# EAGLE board xr_vco_components_preroute3 (EAGLE 7.3.0)
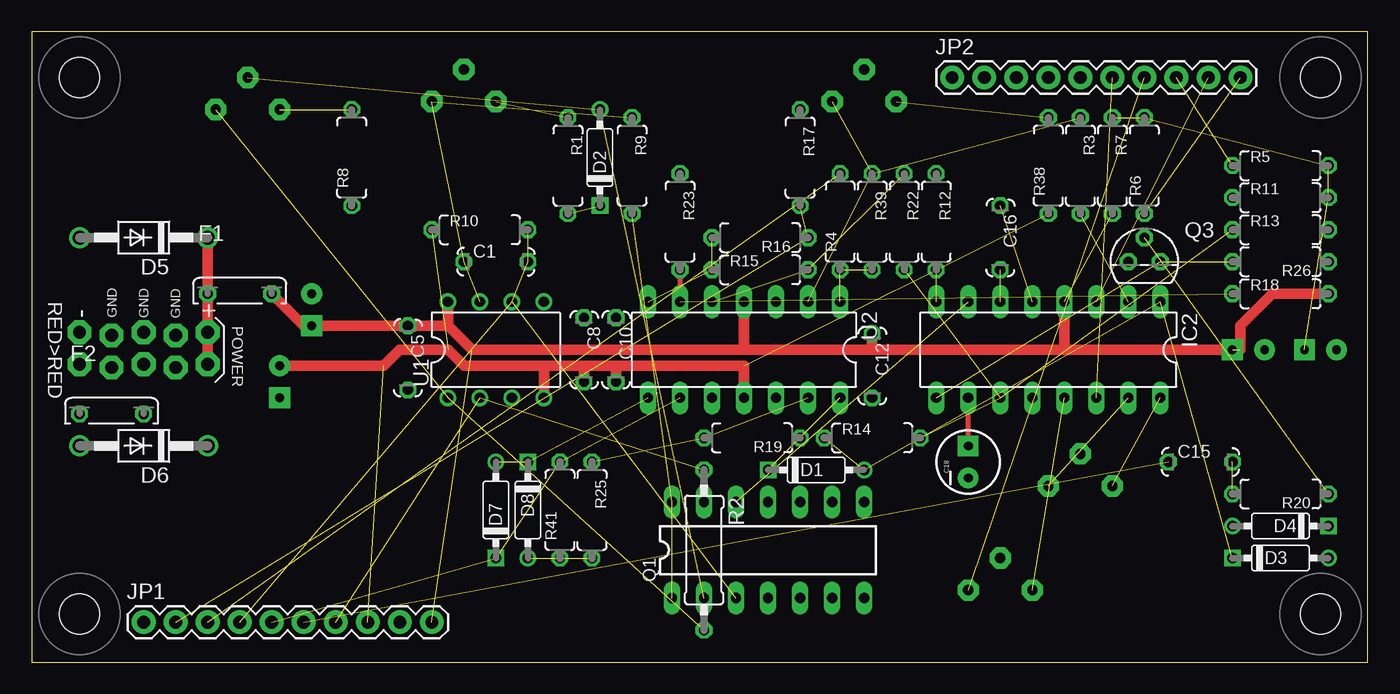
[diagram p0: board, top side]
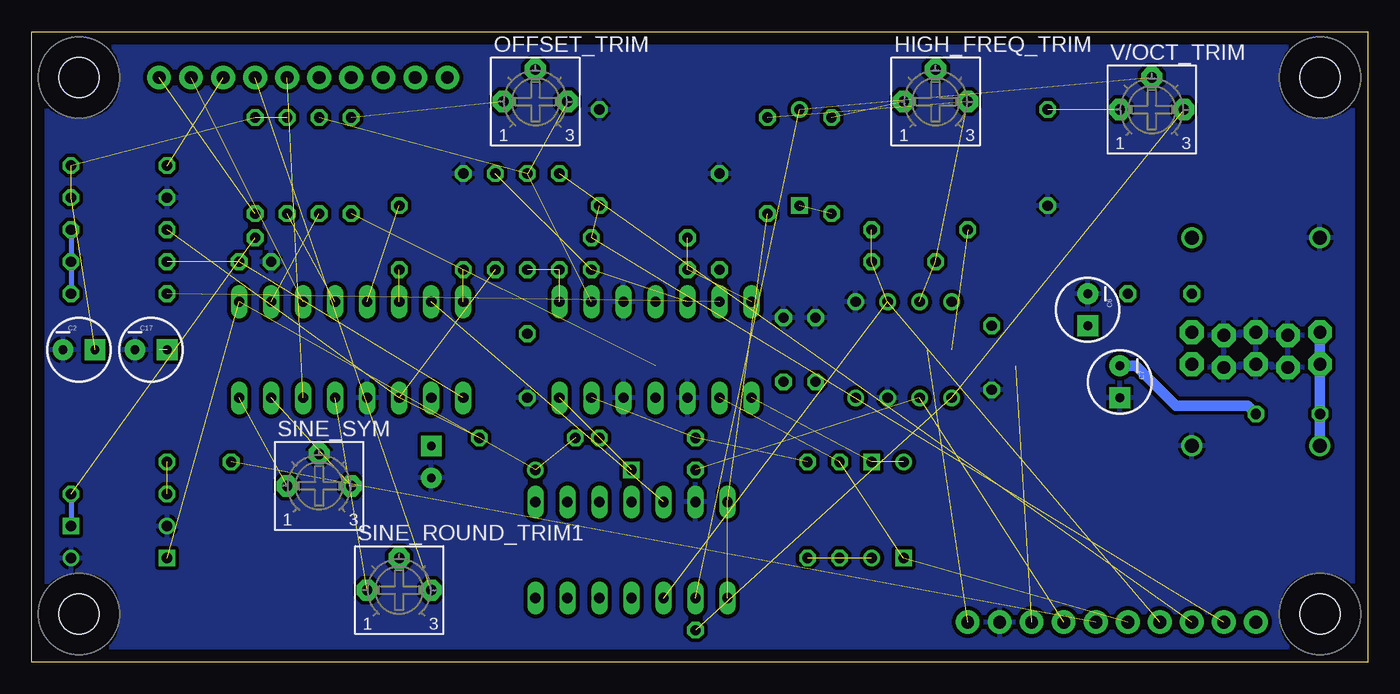
[diagram p1: board, bottom side, seen from below]

Size 106 x 50 mm. Coordinates in mm from the lower left corner, seen from the top.
Outline: 0,0 106,0 106,50 0,50 0,0
Copper layers (1*16): Top 0.035mm / dielectric 1.5mm / Bottom 0.035mm
Design rules "default *": minimum track width 10mil, minimum drill 24mil, track to track 12mil, track to pad 12mil, pad to pad 12mil, via to via 8mil, smd to smd 8mil, copper to edge 40mil, drill to drill 8mil, minimum pad ring 10mil, minimum via ring 8mil, stop-mask expansion 4mil, vias tented up to drill 0mil, thermal gap 10mil
Net classes: 1 power: width 0.406 mm; 2 ground: width 0.305 mm

## Footprints (pad centres in the part's own frame; a part is rotated, then mirrored left to right if it is on the bottom)
C050-024X044 = drill 0.813 octagon: 1 -2.54,0; 2 2.54,0
CPOL-RADIAL-10UF-25V = drill 0.7 pad 1.651 square: 1 1.27,0 | drill 0.7 pad 1.651: 2 -1.27,0
DO35-7 = drill 0.813: A 3.81,0 | drill 0.813 square: C -3.81,0
DO41-10 = drill 1.118: A 5.08,0; C -5.08,0
C050H075X075 = drill 0.813 octagon: 1 -2.54,0; 2 2.54,0
BOURNS_3362P_TRIMMER = drill 0.813 pad 1.676 octagon: 1 -2.54,0; 2 0,2.54; 3 2.54,0
DIL16 = drill 0.813 long: 1 -8.89,-3.81; 2 -6.35,-3.81; 3 -3.81,-3.81; 4 -1.27,-3.81; 5 1.27,-3.81; 6 3.81,-3.81; 7 6.35,-3.81; 8 8.89,-3.81; 9 8.89,3.81; 10 6.35,3.81; 11 3.81,3.81; 12 1.27,3.81; 13 -1.27,3.81; 14 -3.81,3.81; 15 -6.35,3.81; 16 -8.89,3.81
1X10 = drill 1.016 pad 1.88: 1 0,0; 2 2.54,0; 3 5.08,0; 4 7.62,0; 5 10.16,0; 6 12.7,0; 7 15.24,0; 8 17.78,0; 9 20.32,0; 10 22.86,0
DIL14 = drill 0.813 long: 1 -7.62,-3.81; 2 -5.08,-3.81; 3 -2.54,-3.81; 4 0,-3.81; 5 2.54,-3.81; 6 5.08,-3.81; 7 7.62,-3.81; 8 7.62,3.81; 9 5.08,3.81; 10 2.54,3.81; 11 0,3.81; 12 -2.54,3.81; 13 -5.08,3.81; 14 -7.62,3.81
TO92D = drill 0.813 octagon: B 0,1.905; C 1.27,0; E -1.27,0
7MM_RESISTOR = drill 0.813 octagon: 1 -3.81,0; 2 3.81,0
0309/12 = drill 0.813 octagon: 1 -6.35,0; 2 6.35,0
EURO_PWR_HEADER_LOCK = drill 1.016 pad 1.88 octagon: GND1 -2.54,1.143; GND2 -2.54,-1.397; GND3 0,1.397; GND4 0,-1.143; GND5 2.54,1.143; GND6 2.54,-1.397; NEG1 -5.08,1.397; NEG2 -5.08,-1.143; POS1 5.08,1.397; POS2 5.08,-1.143
DIL08 = drill 0.813 pad 1.27: 1 -3.81,-3.81; 2 -1.27,-3.81; 3 1.27,-3.81; 4 3.81,-3.81; 5 3.81,3.81; 6 1.27,3.81; 7 -1.27,3.81; 8 -3.81,3.81
MOUNTING_HOLE = hole 3.2: 0,0

## Placement (x,y rotation side)
C1  100pf  [C050-024X044]  36.83,31.75 0 top
C2  10uf  [CPOL-RADIAL-10UF-25V]  102.23,24.77 0 bottom
C5  100n  [C050-024X044]  29.84,24.13 270 top
C6  10uf  [CPOL-RADIAL-10UF-25V]  22.23,27.94 270 bottom
C7  10uf  [CPOL-RADIAL-10UF-25V]  19.68,22.23 270 bottom
C8  100n  [C050-024X044]  43.81,24.77 270 top
C10  100n  [C050-024X044]  46.35,24.77 270 top
C12  100n  [C050-024X044]  66.67,23.5 270 top
C15  470pf  [C050-024X044]  92.71,15.88 0 top
C16  0.047uf  [C050-024X044]  76.83,33.66 270 top
C17  4.7uf  [CPOL-RADIAL-10UF-25V]  96.52,24.77 0 bottom
C18  4.7uf  [CPOL-RADIAL-10UF-25V]  74.3,15.88 90 top
D1  1N4148  [DO35-7]  62.23,15.24 0 top
D2  1N4148  [DO35-7]  45.09,40.01 90 top
D3  1N4148  [DO35-7]  99.06,8.26 0 top
D4  1N4148  [DO35-7]  99.06,10.79 180 top
D5  1N4001  [DO41-10]  8.89,33.66 180 top
D6  1N4001  [DO41-10]  8.89,17.14 180 top
D7  1N4148  [DO35-7]  36.83,12.06 90 top
D8  1N4148  [DO35-7]  39.37,12.06 270 top
F1  FUSE  [C050H075X075]  16.51,29.21 0 top
F2  FUSE  [C050H075X075]  6.35,19.68 0 top
HIGH_FREQ_TRIM  1M  [BOURNS_3362P_TRIMMER]  34.29,44.45 0 bottom
IC2  [DIL16]  80.64,24.77 180 top
JP1  M10"  [1X10]  8.89,3.17 0 top
JP2  M10"  [1X10]  73.03,46.35 0 top
OFFSET_TRIM  50k  [BOURNS_3362P_TRIMMER]  66.04,44.45 0 bottom
Q1  THAT300P  [DIL14]  58.42,8.89 0 top
Q3  2N3904  [TO92D]  88.27,31.75 0 top
R1  47k  [7MM_RESISTOR]  42.55,39.37 270 top
R2  2k  [0309/12]  53.34,8.89 270 top
R3  82k  [7MM_RESISTOR]  83.19,39.37 270 top
R4  1k  [7MM_RESISTOR]  64.14,34.92 90 top
R5  11k  [7MM_RESISTOR]  99.06,39.37 0 top
R6  20k  [7MM_RESISTOR]  88.27,39.37 90 top
R7  5.6k  [7MM_RESISTOR]  85.72,39.37 270 top
R8  390R  [7MM_RESISTOR]  25.4,40.01 90 top
R9  4.7k  [7MM_RESISTOR]  47.62,39.37 270 top
R10  1.2m  [7MM_RESISTOR]  35.56,34.29 0 top
R11  5.6k  [7MM_RESISTOR]  99.06,36.83 0 top
R12  1k  [7MM_RESISTOR]  71.75,34.92 270 top
R13  4.7k  [7MM_RESISTOR]  99.06,34.29 0 top
R14  10k  [7MM_RESISTOR]  66.67,17.78 0 top
R15  2.2M  [7MM_RESISTOR]  57.78,31.11 0 top
R16  3k  [7MM_RESISTOR]  57.78,33.66 180 top
R17  1.8k  [7MM_RESISTOR]  60.96,40.01 270 top
R18  10k  [7MM_RESISTOR]  99.06,29.21 0 top
R19  10k  [7MM_RESISTOR]  57.15,17.78 180 top
R20  100k  [7MM_RESISTOR]  99.06,13.34 180 top
R22  2.2k  [7MM_RESISTOR]  69.22,34.92 270 top
R23  10k  [7MM_RESISTOR]  51.44,34.92 270 top
R25  10k  [7MM_RESISTOR]  44.45,12.06 270 top
R26  4.7k  [7MM_RESISTOR]  99.06,31.75 180 top
R38  150k  [7MM_RESISTOR]  80.64,39.37 90 top
R39  200k  [7MM_RESISTOR]  66.67,34.92 270 top
R41  220k  [7MM_RESISTOR]  41.91,12.06 90 top
SINE_ROUND_TRIM1  500 Ohm  [BOURNS_3362P_TRIMMER]  76.83,5.71 0 bottom
SINE_SYM  25k  [BOURNS_3362P_TRIMMER]  83.19,13.97 0 bottom
SV1  EURO_POWER_HEADERLOCK_PADS  [EURO_PWR_HEADER_LOCK]  8.89,24.77 0 top
U1  LF442N  [DIL08]  36.83,24.77 0 top
U2  TL074P  [DIL14]  56.52,24.77 180 top
U$1  [MOUNTING_HOLE]  3.81,46.35 0 top
U$2  [MOUNTING_HOLE]  102.23,46.35 0 top
U$3  [MOUNTING_HOLE]  102.23,3.81 0 top
U$4  [MOUNTING_HOLE]  3.81,3.81 0 top
V/OCT_TRIM  100R  [BOURNS_3362P_TRIMMER]  17.14,43.81 0 bottom

## Library data of the parts
C1 C5 C8 C10 C12 C15 C16 F1 F2 = TomW
C2 C6 C7 C17 C18 = SparkFun-Passives
D1-D4 D7 D8 HIGH_FREQ_TRIM OFFSET_TRIM R1 R3-R20 R22 R23 R25 R26 R38 R39 R41 SINE_ROUND_TRIM1 SINE_SYM SV1 U$1-U$4 V/OCT_TRIM = MusicThingModular
D5 D6 = diode
IC2 = exar; OC_FARNELL: unknown; OC_NEWARK: unknown
JP1 JP2 = SparkFun-Connectors
Q1 = that-corp
Q3 = transistor-small-signal
R2 = resistor
U1 U2 = linear

## Nets
+12V: C5.1 C6.1 C12.1 C17.1 F1.2 IC2.4 JP1.10 R7.2 R13.2 R18.2 R26.1 U1.8 U2.4
+12V_INLET [power]: D5.C F1.1 SV1.POS1 SV1.POS2
-12V: C7.2 C8.2 C10.2 F2.2 JP1.8 R10.1 R38.1 U1.4 U2.11
-12V_INLET [power]: D6.A F2.1 SV1.NEG1 SV1.NEG2
CATH_D4: D1.C R19.1 U2.14
GND: C2.2 C5.2 C6.2 C7.1 C8.1 C10.1 C12.2 C17.2 C18.2 D3.A D4.A D5.A D6.C IC2.12 JP1.9 Q1.13 Q3.E R8.1 R11.1 R12.1 R17.1 R23.1 SINE_SYM.2 SV1.GND1 SV1.GND2 SV1.GND3 SV1.GND4 SV1.GND5 SV1.GND6 U1.3 U1.5 U2.3 U2.10 U2.12
LIN_FM_CV: C1.2 JP1.4 Q1.3 R10.2 U1.6
N$1: IC2.7 Q1.12
N$2: D2.C R1.2
N$3: HIGH_FREQ_TRIM.1 R1.1
N$5: IC2.2 R3.2
N$7: R2.2 U1.1 V/OCT_TRIM.3
N$8: OFFSET_TRIM.3 R3.1 R39.1 U2.2
N$9: R8.2 V/OCT_TRIM.1
N$10: D2.A Q1.2 V/OCT_TRIM.2
N$11: Q1.1 Q1.14 R9.2
N$12: OFFSET_TRIM.1 R38.2
N$13: R4.1 R39.2 U2.1
N$15: C1.1 HIGH_FREQ_TRIM.3 R9.1 U1.7
N$16: C2.1 R5.2 R6.2 R7.1 R11.2
N$17: IC2.16 SINE_SYM.1
N$20: IC2.13 SINE_ROUND_TRIM1.1
N$21: IC2.15 SINE_SYM.3
N$22: IC2.8 R12.2
N$23: R18.1 R23.2 U2.6
N$24: R15.1 R16.2 U2.7
N$25: R19.2 R25.1 U2.13
N$26: R15.2 R22.1 U2.5
N$27: D1.A D3.C IC2.1 R14.1
N$28: C15.2 R20.2
N$29: D4.C Q3.B R20.1
N$30: IC2.11 R13.1 R14.2 R22.2
N$31: IC2.9 Q3.C R26.2
N$32: C16.2 IC2.6
N$33: C16.1 IC2.5
N$34: C18.1 IC2.10
N$35: D7.A D8.C U2.8
N$36: D8.A R25.2 R41.1
PITCH_CV: JP1.7 R2.1 U1.2
SINE_TRI_OUT: JP1.3 R4.2
SKEW_IN: D7.C JP1.5 R41.2 U2.9
SQR_OUT: JP1.2 R16.1 R17.2
SW_1: JP2.10 R6.1
SW_2: IC2.3 JP2.9
SW_3: JP2.8 R5.1
SW_4: JP2.7 SINE_ROUND_TRIM1.3
SW_5: IC2.14 JP2.6
SYNC_IN: C15.1 JP1.6

## Tracks (layer width: path | path; a pad name or v marks a point on that pad's centre or on a via)
+12V  (3 unrouted)
  Top 0.813: F1.2 21.59,26.67 C6.1 C5.1 33.02,26.67 | U1.8 33.02,26.67 | 33.02,26.67 34.92,24.77 56.52,24.77 | U2.4 56.52,24.77 | 66.67,24.77 56.52,24.77 | C12.1 66.67,24.77 | 66.67,24.77 81.92,24.77 | IC2.4 81.92,24.77 | 81.92,24.77 95.89,24.77 95.89,26.67 98.42,29.21 R18.2
  Bottom 0.406: R13.2 R26.1 R18.2
+12V_INLET
  Top 0.813: SV1.POS2 SV1.POS1 F1.1 D5.C
-12V  (3 unrouted)
  Top 0.813: U1.4 40.64,23.5 | 40.64,23.5 43.81,23.5 | 43.81,23.5 46.35,23.5 | 46.35,23.5 56.52,23.5 U2.11 | C10.2 46.35,23.5 | C8.2 43.81,23.5 | C7.2 27.94,23.5 29.21,24.77 33.02,24.77 34.29,23.5 40.64,23.5
  Bottom 0.813: F2.2 9.53,20.32 15.24,20.32 18.41,23.5 C7.2
-12V_INLET
  Bottom 0.813: SV1.NEG1 SV1.NEG2 F2.1 D6.A
CATH_D4  (2 unrouted)
GND
  pour Bottom: -0.64,50.8 -0.64,-0.64 106.68,-0.64 106.68,0 106.68,50.8
LIN_FM_CV  (4 unrouted)
N$1  (1 unrouted)
N$2  (1 unrouted)
N$3  (1 unrouted)
N$5  (1 unrouted)
N$7  (2 unrouted)
N$8  (3 unrouted)
N$9  (1 unrouted)
N$10  (2 unrouted)
N$11  (2 unrouted)
N$12  (1 unrouted)
N$13  (2 unrouted)
N$15  (3 unrouted)
N$16  (4 unrouted)
N$17  (1 unrouted)
N$20  (1 unrouted)
N$21  (1 unrouted)
N$22  (1 unrouted)
N$23  (1 unrouted)
  Top 0.406: R23.2 U2.6
N$24  (2 unrouted)
N$25  (2 unrouted)
N$26  (2 unrouted)
N$27  (3 unrouted)
N$28  (1 unrouted)
N$29  (1 unrouted)
  Bottom 0.406: R20.1 D4.C
N$30  (3 unrouted)
N$31  (2 unrouted)
N$32  (1 unrouted)
N$33  (1 unrouted)
N$34
  Top 0.406: C18.1 IC2.10
N$35  (2 unrouted)
N$36  (2 unrouted)
PITCH_CV  (2 unrouted)
SINE_TRI_OUT  (1 unrouted)
SKEW_IN  (3 unrouted)
SQR_OUT  (2 unrouted)
SW_1  (1 unrouted)
SW_2  (1 unrouted)
SW_3  (1 unrouted)
SW_4  (1 unrouted)
SW_5  (1 unrouted)
SYNC_IN  (1 unrouted)